# EAGLE board Kirchoff's Voltage Law (EAGLE 9.7.0)

Size 116.56 x 36.22 mm. Coordinates in mm from the lower left corner, seen from the top.
Outline: 0,0 116.56,0 116.56,36.22 0,36.22 0,0
Copper layers (1*16): Top 0.035mm / dielectric 1.5mm / Bottom 0.035mm
Design rules "default": minimum track width 6mil, minimum drill 0.35mm, track to track 6mil, track to pad 6mil, pad to pad 6mil, via to via 6mil, smd to smd 6mil, copper to edge 40mil, drill to drill 6mil, minimum pad ring 10mil, minimum via ring 8mil, stop-mask expansion 4mil, vias tented up to drill 0mil, thermal gap 10mil

## Footprints (pad centres in the part's own frame; a part is rotated, then mirrored left to right if it is on the bottom)
BATTERY-GENERIC = drill 1.118 pad 3.15 octagon: + 2.54,0; - -2.54,0
RESAD1016W63L850D250B = drill 0.83 pad 1.43: 1 -5.08,0; 2 5.08,0

## Placement (x,y rotation side)
BAT1  9V  [BATTERY-GENERIC]  8.26,8.26 180 top
RR1  5k  [RESAD1016W63L850D250B]  84.83,27.35 0 top
RR2  5k  [RESAD1016W63L850D250B]  94.99,29.89 0 top
RR3  5k  [RESAD1016W63L850D250B]  105.15,27.35 0 top
RR4  5k  [RESAD1016W63L850D250B]  89.91,19.73 90 top
RR5  5k  [RESAD1016W63L850D250B]  100.07,19.73 90 top
RR6  5k  [RESAD1016W63L850D250B]  110.23,14.65 90 top

## Library data of the parts
BAT1 RR1-RR6 = Tinkercad

## Nets
BAT1+: BAT1.+ RR1.1
BAT1-: BAT1.- RR4.1 RR5.1 RR6.1
RR1_2: RR1.2 RR2.1 RR4.2
RR3_1: RR2.2 RR3.1 RR5.2
RR6_2: RR3.2 RR6.2

## Tracks (layer width: path | path; a pad name or v marks a point on that pad's centre or on a via)
BAT1+  (1 unrouted)
BAT1-  (3 unrouted)
RR1_2  (2 unrouted)
RR3_1  (2 unrouted)
RR6_2  (1 unrouted)